# Altium PCB 正负开关电源.PcbDoc
Units mil, origin at the board's own origin, x right, y up, seen from the top; angles counter-clockwise.
Board outline 1968 x 1968 mil, 2 copper layers (Top Layer, Bottom Layer); 66 components, 32 nets, 180 pads, 772 vias.
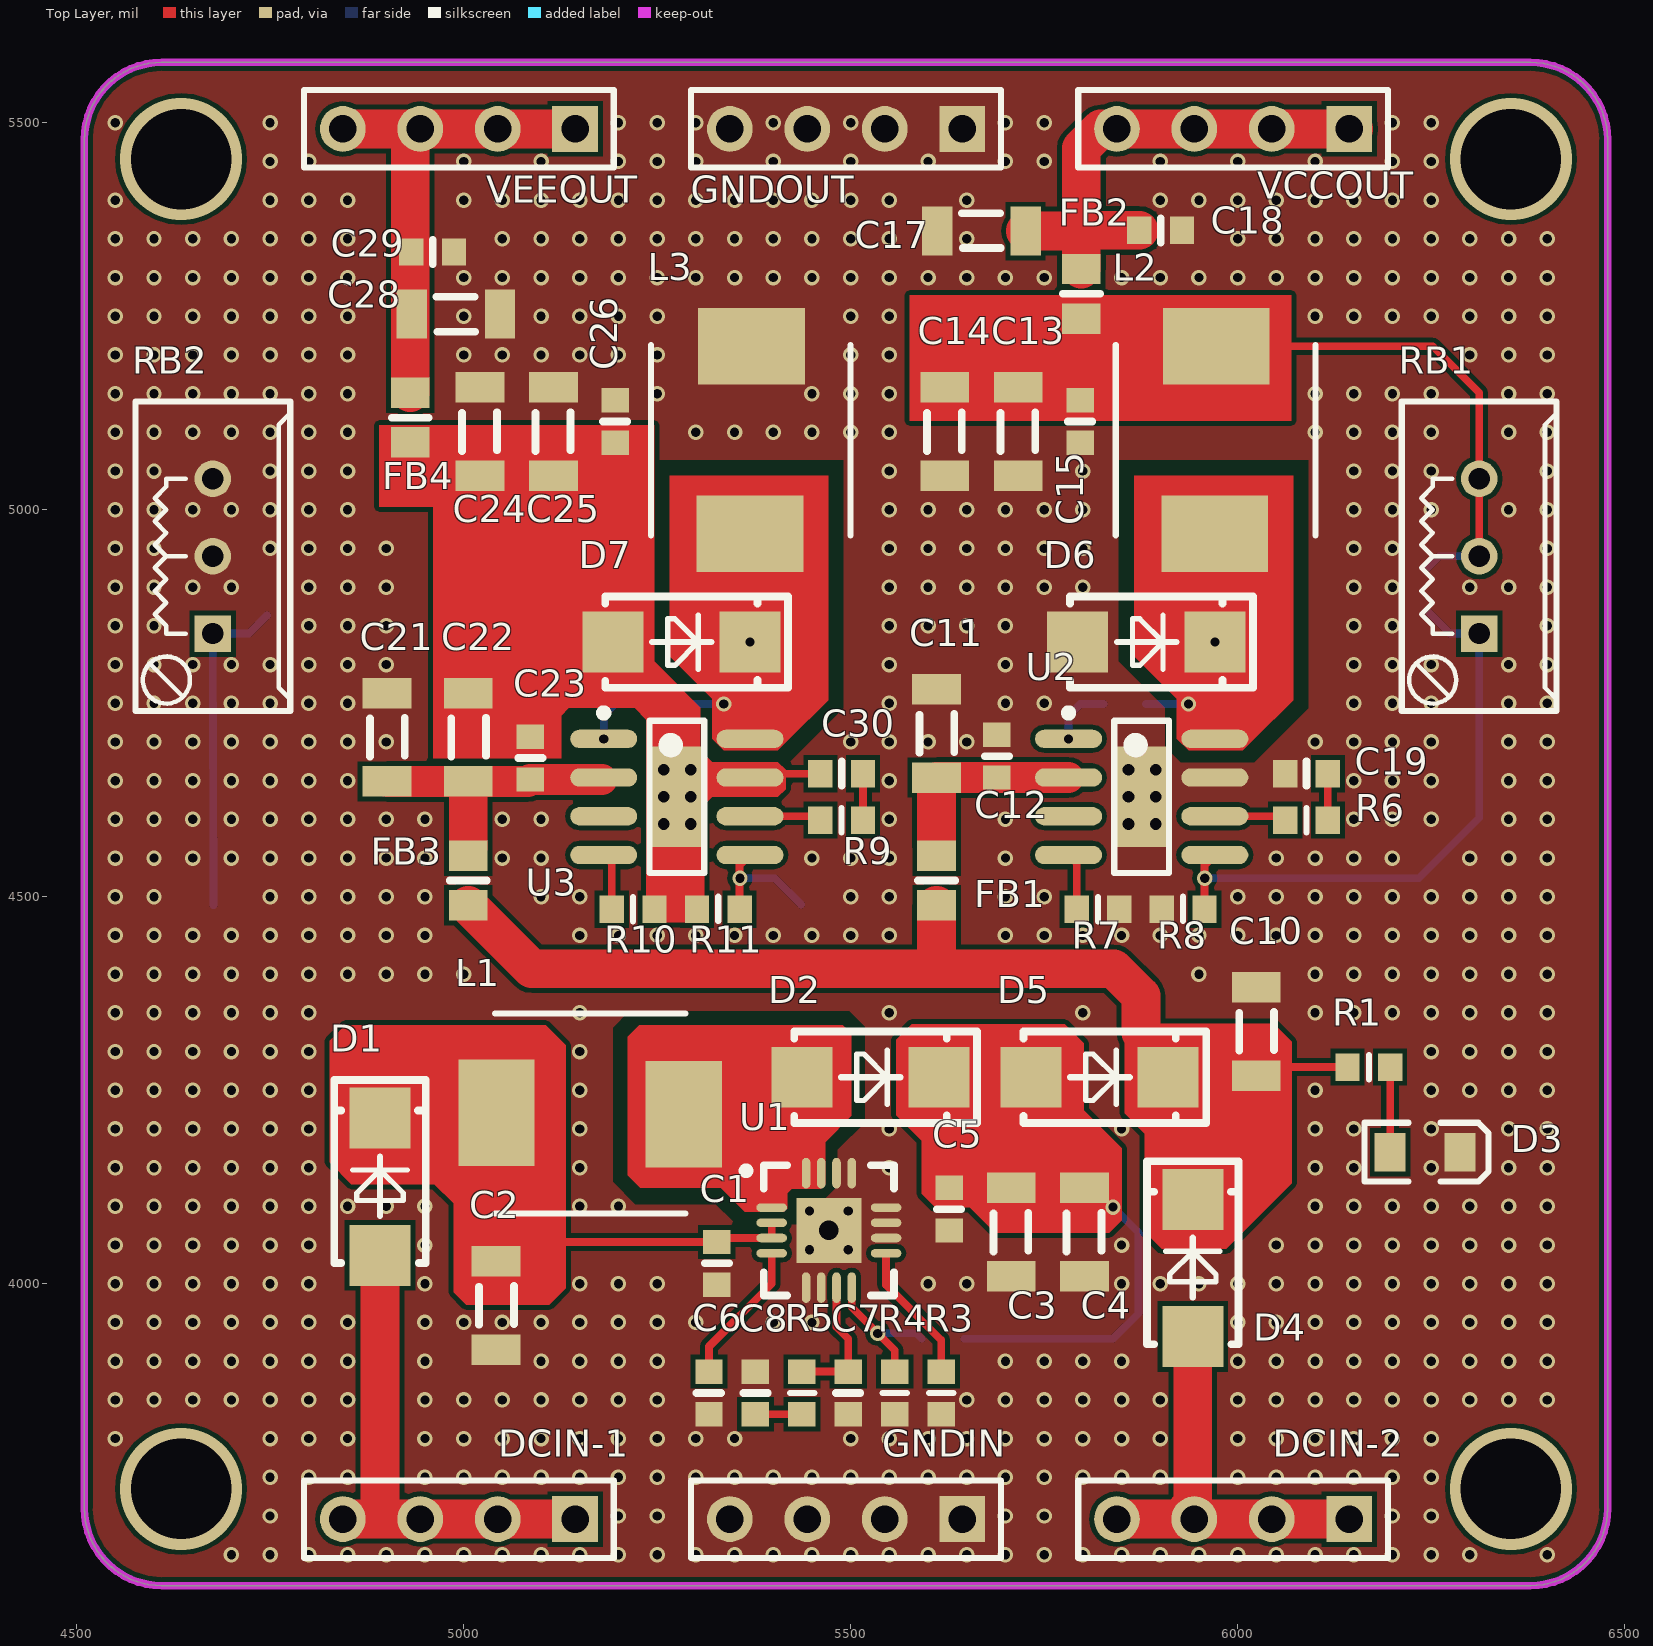
[diagram p0: Top Layer view]
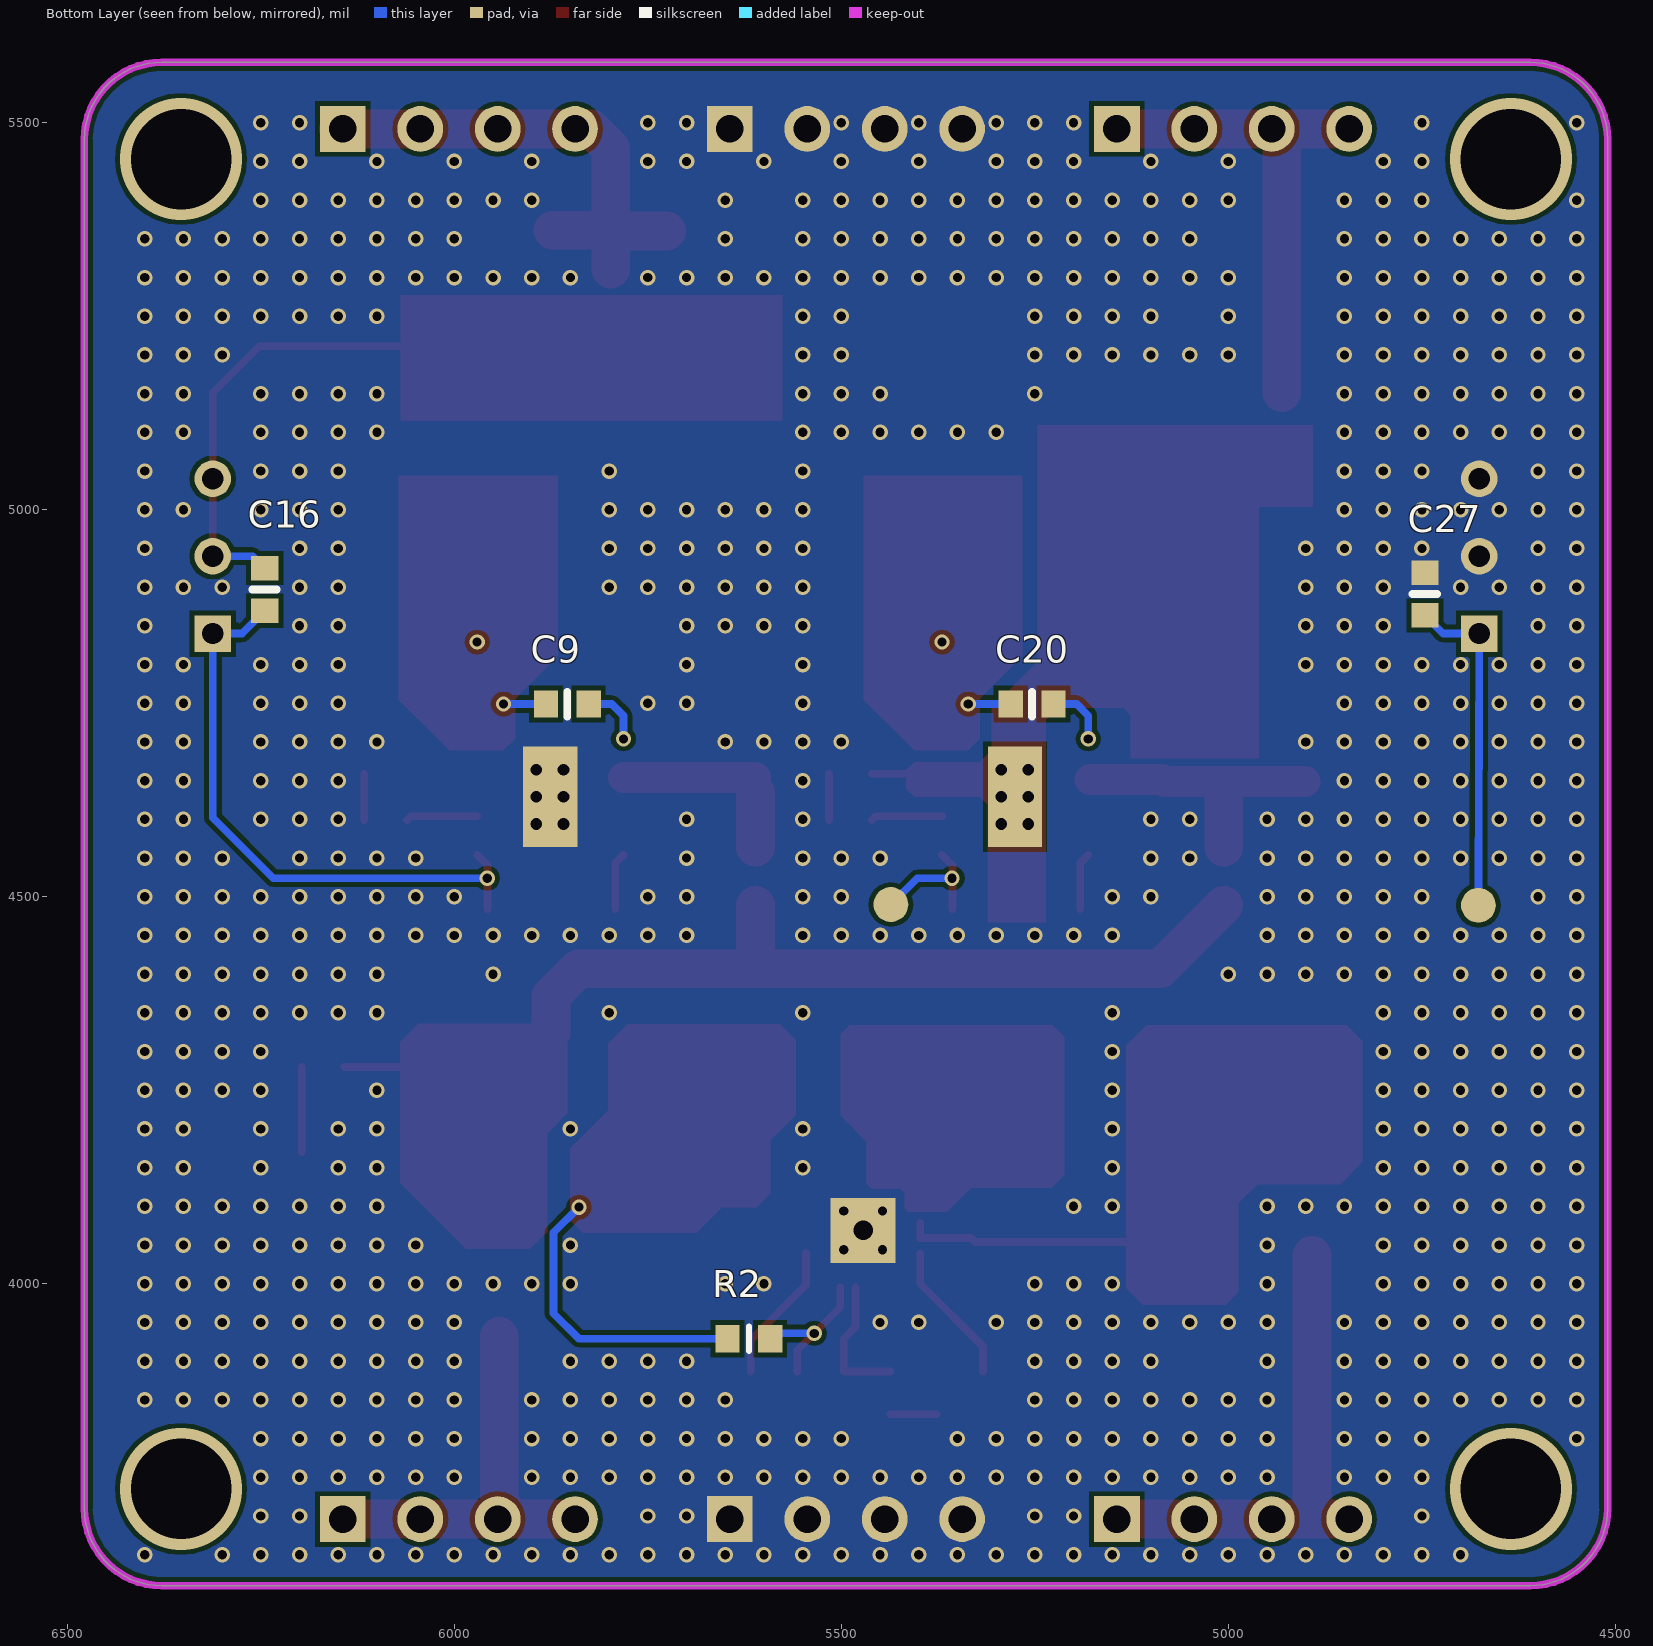
[diagram p1: Bottom Layer view, seen from below]

## Layer stack, top to bottom
Top Solder: solder mask 0.4, Solder Resist, Dk 3.5
Top Layer: signal copper 1.4
Dielectric 1: dielectric 12.6, FR-4, Dk 4.8
Bottom Layer: signal copper 1.4
Bottom Solder: solder mask 0.4, Solder Resist, Dk 3.5

## Board outline
4510,3710 ccw(c4610,3710) 4610,3610 6378,3610 ccw(c6378,3710) 6478,3710 6478,5478 ccw(c6378,5478) 6378,5578 4610,5578 ccw(c4610,5478) 4510,5478

## Design rules (kind name [scope] priority, off if disabled: settings)
Clearance [All] p1: gap=6 ignorepadtopadclearanceinfootprint=TRUE
ComponentClearance [All] p1: gap=0 collisioncheckmode=3 verticalgap=0 showdistances=FALSE
HoleSize [All] p1: absolutevalues=TRUE maxlimit=129.92 minlimit=3.94 maxpercent=80.000 minpercent=20.000
MinimumSolderMaskSliver [All] p1: minsoldermaskwidth=0
PolygonConnect [All] p1: connectstyle=Direct reliefconductorwidth=10 reliefentries=4 polygonreliefangle="90 Angle" airgapwidth=10
RoutingVias [All] p1: holewidth=11.81 width=19.68 viastyle="Through Hole" minholewidth=11.81 minwidth=19.68 maxholewidth=129.92 maxwidth=157.48
SilkToSilkClearance [All] p1: silktosilkclearance=0
SilkToSolderMaskClearance [IsPad] p1: minsilkscreentomaskgap=0 clearancetoexposedcopper=TRUE
SolderMaskExpansion [All] p1: expansion=4 istentingtop=FALSE
Width [All] p1: maxlimit=100 minlimit=5 preferedwidth=5 minimp=50.000000 maximp=50.000000 favimp=50.000000
25 further rules are at their usual default settings.

## Classes and differential pairs
component class power: C1 C2 C3 C4 C5 C6 C7 C8 C9 C10 C11 C12 C13 C14 C15 C16 C17 C18 C19 C20 C21 C22 C23 C24 C25 C26 C27 C28 C29 C30 D1 D2 D3 D4 D5 D6 D7 FB1 FB2 FB3 FB4 L1 L2 L3 R1 R2 R3 R4 R5 R6 R7 R8 R9 R10 R11 RB1 RB2 U1 U2 U3
component class ports: DCIN-1 DCIN-2 GNDIN GNDOUT VCCOUT VEEOUT

## Components (designator, comment, footprint, x,y, rotation, side; value= is the part's Value field where it differs from the comment)
C1 "Cap-S" C0603-L 5327,4026.44 r270 top value=100nF
C2 "Cap-S" C1206-L 5042,3971.91 r270 top value=47uF
C3 "Cap-S" C1206-L 5707.51,4066.91 r90 top value=47uF
C4 "Cap-S" C1206-L 5802,4066.91 r90 top value=47uF
C5 "Cap-S" C0603-L 5627.51,4096.44 r90 top value=100nF
C6 "Cap-S" C0603-L 5317,3859 r90 top value=47nF
C7 "Cap-S" C0603-L 5497,3859 r90 top value=270pF
C8 "Cap-S" C0603-L 5377,3859 r270 top value=100nF
C9 "Cap-S" C0603-L 5854.07,4749 r0 bottom value=100nF
C10 "Cap-S" C1206-L 6024,4326 r270 top value=47uF
C11 "Cap-S" C1206-L 5611,4711.09 r270 top value=22uF
C12 "Cap-S" C0603-L 5689,4681.56 r270 top value=100nF
C13 "Cap-S" C1206-L 5716.51,5101.09 r90 top value=47uF
C14 "Cap-S" C1206-L 5621.51,5101.09 r90 top value=47uF
C15 "Cap-S" C0603-L 5796.51,5114 r90 top value=100nF
C16 "Cap-S" C0603-L 6245,4897 r90 bottom value=20pF
C17 "Cap-S" C1206-L 5668.91,5360 r0 top value=47uF
C18 "Cap-S" C0603-L 5900.56,5361 r180 top value=100nF
C19 "Cap-S" C0603-L 6088.95,4659 r0 top value=6.8nF
C20 "Cap-S" C0603-L 5253.56,4749 r0 bottom value=100nF
C21 "Cap-S" C1206-L 4901,4706.09 r270 top value=22uF
C22 "Cap-S" C1206-L 5006,4706.09 r270 top value=22uF
C23 "Cap-S" C0603-L 5086,4679.12 r270 top value=100nF
C24 "Cap-S" C1206-L 5021,5101.09 r90 top value=47uF
C25 "Cap-S" C1206-L 5116,5101.09 r90 top value=47uF
C26 "Cap-S" C0603-L 5196,5114 r90 top value=100nF
C27 "Cap-S" C0603-L 4746,4891 r90 bottom value=20pF
C28 "Cap-S" C1206-L 4989.91,5253 r180 top value=47uF
C29 "Cap-S" C0603-L 4960.06,5333 r180 top value=100nF
C30 "Cap-S" C0603-L 5488.44,4659 r0 top value=6.8nF
D1 "D" D-SMA 4892,4125.42 r90 top
D2 "D" D-SMA 5525.58,4266.83 r0 top
D3 "LED" Led-0805_M 6242,4170 r0 top
D4 "D" D-SMA 5942,4020.42 r90 top
D5 "D" D-SMA 5821.58,4266.83 r0 top
D6 "D" D-SMA 5881.91,4829 r0 top
D7 "D" D-SMA 5281.39,4829 r0 top
DCIN-1 "Header 4" HDR1X4 5144,3696 r180 top
DCIN-2 "Header 4" HDR1X4 6144,3696 r180 top
FB1 "600R" FB-0805 5611,4521 r90 top
FB2 "600R" FB-0805 5798,5279 r90 top
FB3 "600R" FB-0805 5006,4521 r90 top
FB4 "600R" FB-0805 4931,5119 r90 top
GNDIN "Header 4" HDR1X4 5644,3696 r180 top
GNDOUT "Header 4" HDR1X4 5644,5492 r180 top
L1 "2.2uH" L-6.5mm 5163.44,4219.98 r0 top
L2 "10uH" L-6.5mm 5971.47,5090.06 r90 top
L3 "10uH" L-6.5mm 5370.96,5090.06 r90 top
R1 "R" R0603-L 6169.44,4280 r180 top value=30K
R2 "R" R0603-L 5619.56,3929 r0 bottom value=22K
R3 "R" R0603-L 5617,3859 r270 top value=75K
R4 "R" R0603-L 5557,3859 r90 top value=1.6K
R5 "R" R0603-L 5437,3859 r270 top value=1.8K
R6 "R" R0603-L 6088.95,4599 r180 top value=13K
R7 "R" R0603-L 5819.51,4484 r180 top value=110K
R8 "R" R0603-L 5929.51,4484 r0 top value=5.1K
R9 "R" R0603-L 5488.44,4599 r180 top value=13K
R10 "R" R0603-L 5219,4484 r180 top value=110K
R11 "R" R0603-L 5329,4484 r0 top value=5.1K
RB1 "R" R_VR-3296W 6312,4940 r90 top value=100K
RB2 "R" R_VR-3296W 4676,4940 r90 top value=100K
U1 "TPS55330" VQFN-16 5471.88,4069 r0 top
U2 "TPS54360" "SOP-8 with pad" 5876,4629 r0 top
U3 "TPS54360" "SOP-8 with pad" 5275.49,4629 r0 top
VCCOUT "Header 4" HDR1X4 6144,5492 r180 top
VEEOUT "Header 4" HDR1X4 5144,5492 r180 top

## Footprints (in the part's own frame and the unit in brackets; to place one, negate y for a bottom-side part, rotate by r counter-clockwise, add the part's x,y. Pads: shape width x height; smd on the part's side, far side on the other; paste and mask are expansions set on the pad)
C0603-L [mm] "贴片电容0603 高密度"
  rect 0.8x0.9 smd: 1(-0.7,0) 2(0.7,0)
  silkscreen extent 0,-0.39 0,0.41, body extent -0.8,-0.4 0.8,0.41, height 0.88
C1206-L [mm] "Capacitor 1206 (3216) for Startronics  高密度"
  rect 1x1.6 smd: 1(-1.45,0) 2(1.45,0)
  silkscreen extent -0.64,-0.56 0.63,0.58, body extent -1.63,-0.8 1.57,0.8, height 1
D-SMA [mm]
  rect 2x2 smd: 1(-2.25,0) 2(2.25,0)
  silkscreen extent -2.5,-1.5 3.5,1.5, body extent -2.5,-1.35 2.5,1.35, height 2.15
FB-0805 [mil]
  rect 39.37x50 smd: 1(-32,0) 2(32,0)
  silkscreen extent 0,-24 0,24, body extent -40,-25 40,25, height 28
HDR1X4 [mm] "Connector; Header; 4 Position"
  rect 1.5x1.5 hole 0.9: 1(0,0)
  round 1.5 hole 0.9: 2(2.54,0) 3(5.08,0) 4(7.62,0)
  silkscreen extent -1.27,-1.27 8.89,1.27, body extent -1.27,-1.27 8.89,1.27, height 7.58
L-6.5mm [mm]
  rect 2.5x3.5 smd: 1(-3.075,0.025) 2(3.075,-0.025)
  silkscreen extent -3.12,-3.28 3.12,3.28, body extent -3.13,-3 3.13,3, height 3
Led-0805_M [mil] "贴片LED0805-低密度"
  rect 40x50 smd: 1(-45,0) 2(45,0)
  silkscreen extent -78,-38 82,38, body extent -41,-16 40,20, height 33
R0603-L [mm] "贴片电阻0603 高密度"
  rect 0.8x0.9 smd: 1(-0.7,0) 2(0.7,0)
  silkscreen extent 0,-0.39 0,0.41, body extent -0.81,-0.43 0.79,0.39, height 0.53
R_VR-3296W [mm] "Potentiometer; 3 Leads"
  rect 1.2x1.2 hole 0.7: 1(-2.54,0)
  round 1.2 hole 0.7: 2(0,0) 3(2.54,0)
  silkscreen extent -5.08,-2.54 5.08,2.54, body extent -4.75,-2.54 4.75,2.46, height 11.5
"SOP-8 with pad" [mm]
  oval 2.2x0.6 smd: 1(-2.4,1.905) 2(-2.4,0.635) 3(-2.4,-0.635) 4(-2.4,-1.905) 5(2.4,-1.905) 6(2.4,-0.635) 7(2.4,0.635) 8(2.4,1.905)
  rect 1.778x3.3 smd: 9(0,0)
  rect 1.778x3.3 smd far side: 9(0,0)
  silkscreen extent -2.52,-2.5 0.9,2.88, body extent -3.03,-2.5 3.03,2.5, height 1.9
VQFN-16 [mm]
  oval 1x0.28 smd: 1(-1.877,0.75) 2(-1.877,0.25) 3(-1.877,-0.25) 4(-1.877,-0.75) 9(1.877,-0.75) 10(1.877,-0.25) 11(1.877,0.25) 12(1.877,0.75)
  oval 0.28x1 smd: 5(-0.75,-1.877) 6(-0.25,-1.877) 7(0.25,-1.877) 8(0.75,-1.877) 13(0.75,1.877) 14(0.25,1.877) 15(-0.25,1.877) 16(-0.75,1.877)
  rect 2.14x2.14 smd: 17(0,0)
  rect 2.14x2.14 smd far side: 17(0,0)
  silkscreen extent -2.83,-2.13 2.13,2.13, body extent -1.85,-1.85 1.85,1.85, height 1.4

## Part data
C1 C2 C3 C4 C5 C6 C7 C8 C9 C10 C11 C12 C13 C14 C15 C16 C17 C18 C19 C20 C21 C22 C23 C24 C25 C26 C27 C28 C29 C30: "贴片瓷片电容"
D1 D2 D4 D5 D6 D7: library part Diode, "二极管", Model=1N5824
D3: "发光二极管"
DCIN-1 DCIN-2 GNDIN GNDOUT VCCOUT VEEOUT: "Header, 4-Pin", LatestRevisionDate=17-Jul-2002, LatestRevisionNote="Re-released for DXP Platform.", Publisher="Altium Limited"
FB1 FB2 FB3 FB4: library part FB
L1 L2 L3: library part Inductor
R1 R2 R3 R4 R5 R6 R7 R8 R9 R10 R11: library part Res, "贴片电阻"
RB1 RB2: library part Res_Val, "可调电阻"
U2 U3: library part TPS54560

## Free pads (board coordinates)
  round 45 smd far side: 7(4677,4489) 7(5436,4490)

## Via types
v1: diameter 20, hole 12, Top Layer to Bottom Layer, tented both sides, 741 vias
v2: diameter 25, hole 15, Top Layer to Bottom Layer, 12 vias
v3: diameter 19.68, hole 11.81, Top Layer to Bottom Layer, tented both sides, 10 vias
v4: diameter 157.48, hole 129.92, Top Layer to Bottom Layer, 4 vias
v5: diameter 20, hole 12, Top Layer to Bottom Layer, 4 vias
v6: diameter 35, hole 25, Top Layer to Bottom Layer, 1 vias

## Nets (pads, with @x,y where several pads share a name; then routed paths per layer and width w, separated by ;. In a path a pad name is that pad's centre, name@x,y a point inside that pad or via, vN(x,y) a via of type N, cw(c..) or ccw(c..) an arc to the next point about the centre after c; other vN are vias at no path point)
+16.0V: C3.2 C4.2 C5.2 D2.2 D5.1 R2.2 | length 389.2
  Bottom Layer w10: R2.2 5839,3929 5872,3962 5872,4066 v3(5839,4099)
GND: C1.2 C2.2 C3.1 C4.1 C5.1 C6.1 C7.1 C8.1 C10.1 C11.1 C12.1 C13.1 C14.1 C15.1 C17.1 C18.1 C19.1 C21.1 C24.2 C25.2 C26.2 C27.2 C28.1 C29.1 D3.2 D6.1 GNDIN.1 GNDIN.2 GNDIN.3 GNDIN.4 GNDOUT.1 GNDOUT.2 GNDOUT.3 GNDOUT.4 L3.2 R3.2 R4.1 R7.1 R8.1 RB2.2 RB2.3 U1.5 U1.6 U1.10 U1.11 U1.12 U1.13 U1.14 U1.17 U2.7 U2.9
  other v1: 4700,3650 4750,3650 4800,3650 4850,3650 4900,3650 4950,3650 5000,3650 5050,3650 5100,3650 5150,3650 5200,3650 5250,3650 5300,3650 5350,3650 5400,3650 5450,3650 5500,3650 5550,3650 5600,3650 5650,3650 5700,3650 5750,3650 5800,3650 5850,3650 5900,3650 5950,3650 6000,3650 6050,3650 6100,3650 6150,3650 6200,3650 6250,3650 6300,3650 6400,3650 4750,3700 5200,3700 5250,3700 5700,3700 5750,3700 6200,3700 6250,3700 4750,3750 4800,3750 4850,3750 4950,3750 5000,3750 5050,3750 5100,3750 5150,3750 5200,3750 5250,3750 5300,3750 5350,3750 5400,3750 5450,3750 5500,3750 5550,3750 5600,3750 5650,3750 5700,3750 5750,3750 5800,3750 5850,3750 5900,3750 6000,3750 6050,3750 6100,3750 6150,3750 6200,3750 6250,3750 4550,3800 4750,3800 4800,3800 4850,3800 4950,3800 5000,3800 5050,3800 5100,3800 5150,3800 5200,3800 5250,3800 5300,3800 5350,3800 5500,3800 5550,3800 5600,3800 5650,3800 5700,3800 5750,3800 5800,3800 5850,3800 5900,3800 6000,3800 6050,3800 6100,3800 6150,3800 6200,3800 6250,3800 4550,3850 4600,3850 4650,3850 4700,3850 4750,3850 4800,3850 4850,3850 4950,3850 5000,3850 5050,3850 5100,3850 5150,3850 5200,3850 5250,3850 5650,3850 5700,3850 5750,3850 5800,3850 5850,3850 5900,3850 6000,3850 6050,3850 6100,3850 6150,3850 6200,3850 6250,3850 6300,3850 6350,3850 6400,3850 4550,3900 4600,3900 4650,3900 4700,3900 4750,3900 4800,3900 4850,3900 4950,3900 5100,3900 5150,3900 5200,3900 5250,3900 5700,3900 5750,3900 5800,3900 5850,3900 6000,3900 6050,3900 6100,3900 6150,3900 6200,3900 6250,3900 6300,3900 6350,3900 6400,3900 4550,3950 4600,3950 4650,3950 4700,3950 4750,3950 4800,3950 4850,3950 4950,3950 5000,3950 5050,3950 5100,3950 5150,3950 5200,3950 5250,3950 5300,3950 5400,3950 5450,3950 6000,3950 6050,3950 6100,3950 6150,3950 6200,3950 6250,3950 6300,3950 6350,3950 6400,3950 4550,4000 4600,4000 4650,4000 4700,4000 4750,4000 4800,4000 4950,4000 5150,4000 5200,4000 5250,4000 5600,4000 5650,4000 5850,4000 5900,4000 5950,4000 6000,4000 6050,4000 6100,4000 6150,4000 6200,4000 6250,4000 6300,4000 6350,4000 6400,4000 4550,4050 4600,4050 4650,4050 4700,4050 4750,4050 4800,4050 4950,4050 5850,4050 6050,4050 6100,4050 6150,4050 6200,4050 6250,4050 6300,4050 6350,4050 6400,4050 4550,4100 4600,4100 4650,4100 4700,4100 4750,4100 4800,4100 4850,4100 4900,4100 4950,4100 5150,4100 5200,4100 6100,4100 6150,4100 6200,4100 6250,4100 6300,4100 6350,4100 6400,4100 4550,4150 4600,4150 4650,4150 4700,4150 4750,4150 4800,4150 5150,4150 5550,4150 6100,4150 6150,4150 6250,4150 6350,4150 6400,4150 4550,4200 4600,4200 4650,4200 4700,4200 4750,4200 4800,4200 5150,4200 5550,4200 5850,4200 6100,4200 6150,4200 6250,4200 6350,4200 6400,4200 4550,4250 4600,4250 4650,4250 4700,4250 4750,4250 4800,4250 5150,4250 6100,4250 6250,4250 6300,4250 6350,4250 6400,4250 4550,4300 4600,4300 4650,4300 4700,4300 4750,4300 4800,4300 5150,4300 6250,4300 6300,4300 6350,4300 6400,4300 4550,4350 4600,4350 4650,4350 4700,4350 4750,4350 4800,4350 5150,4350 5550,4350 5800,4350 6100,4350 6150,4350 6200,4350 6250,4350 6300,4350 6350,4350 6400,4350 4550,4400 4600,4400 4650,4400 4700,4400 4750,4400 4800,4400 4850,4400 4900,4400 4950,4400 5000,4400 5950,4400 6100,4400 6150,4400 6200,4400 6250,4400 6300,4400 6350,4400 6400,4400 4550,4450 4600,4450 4650,4450 4700,4450 4750,4450 4800,4450 4850,4450 4900,4450 4950,4450 5150,4450 5200,4450 5250,4450 5300,4450 5350,4450 5400,4450 5450,4450 5500,4450 5550,4450 5700,4450 5750,4450 5800,4450 5850,4450 5900,4450 5950,4450 6000,4450 6050,4450 6100,4450 6150,4450 6200,4450 6250,4450 6300,4450 6350,4450 6400,4450 4550,4500 4600,4500 4750,4500 4800,4500 4850,4500 4900,4500 4950,4500 5100,4500 5150,4500 5500,4500 5550,4500 5700,4500 5750,4500 6000,4500 6050,4500 6100,4500 6150,4500 6200,4500 6250,4500 6300,4500 6350,4500 6400,4500 4550,4550 4600,4550 4650,4550 4700,4550 4750,4550 4800,4550 4850,4550 4900,4550 4950,4550 5050,4550 5100,4550 5450,4550 5500,4550 5550,4550 5700,4550 6050,4550 6100,4550 6150,4550 6200,4550 6300,4550 6350,4550 6400,4550 4550,4600 4600,4600 4650,4600 4700,4600 4750,4600 4800,4600 4850,4600 4900,4600 4950,4600 5050,4600 5100,4600 5550,4600 5700,4600 6150,4600 6200,4600 6250,4600 6350,4600 6400,4600 4550,4650 4600,4650 4650,4650 4700,4650 4750,4650 4800,4650 4850,4650 5550,4650 6150,4650 6200,4650 6250,4650 6350,4650 6400,4650 4550,4700 4600,4700 4650,4700 4700,4700 4750,4700 4800,4700 4850,4700 4900,4700 5500,4700 5550,4700 5600,4700 5650,4700 6100,4700 6150,4700 6200,4700 6250,4700 6350,4700 6400,4700 4550,4750 4600,4750 4650,4750 4700,4750 4750,4750 4800,4750 4850,4750 5550,4750 5700,4750 5750,4750 6150,4750 6200,4750 6250,4750 6350,4750 6400,4750 4550,4800 4600,4800 4650,4800 4700,4800 4750,4800 4800,4800 4850,4800 4900,4800 5550,4800 5700,4800 6150,4800 6200,4800 6250,4800 6350,4800 6400,4800 4550,4850 4600,4850 4800,4850 4850,4850 4900,4850 5550,4850 5600,4850 5650,4850 5700,4850 6150,4850 6200,4850 6400,4850 4550,4900 4600,4900 4650,4900 4700,4900 4800,4900 4850,4900 4900,4900 5550,4900 5600,4900 5650,4900 5700,4900 5750,4900 5800,4900 6150,4900 6200,4900 6300,4900 6350,4900 6400,4900 4550,4950 4600,4950 4750,4950 4800,4950 4850,4950 4900,4950 5550,4950 5600,4950 5650,4950 5700,4950 5750,4950 5800,4950 6150,4950 6200,4950 6400,4950 4550,5000 4600,5000 4650,5000 4700,5000 4750,5000 4800,5000 4850,5000 5550,5000 5600,5000 5650,5000 5700,5000 5750,5000 5800,5000 6150,5000 6200,5000 6250,5000 6350,5000 6400,5000 4550,5050 4600,5050 4750,5050 4800,5050 4850,5050 5550,5050 5800,5050 6150,5050 6200,5050 6250,5050 6400,5050 4550,5100 4600,5100 4650,5100 4700,5100 4750,5100 4800,5100 4850,5100 5300,5100 5350,5100 5400,5100 5450,5100 5500,5100 5550,5100 6100,5100 6150,5100 6200,5100 6250,5100 6350,5100 6400,5100 4550,5150 4600,5150 4650,5150 4700,5150 4750,5150 4800,5150 4850,5150 5250,5150 5450,5150 5500,5150 5550,5150 6100,5150 6150,5150 6200,5150 6250,5150 6350,5150 6400,5150 4550,5200 4600,5200 4650,5200 4700,5200 4750,5200 4800,5200 4850,5200 5000,5200 5050,5200 5100,5200 5150,5200 5200,5200 5250,5200 5500,5200 5550,5200 6300,5200 6350,5200 6400,5200 4550,5250 4600,5250 4650,5250 4700,5250 4750,5250 4800,5250 4850,5250 5000,5250 5100,5250 5150,5250 5200,5250 5250,5250 5500,5250 5550,5250 6100,5250 6150,5250 6200,5250 6250,5250 6300,5250 6350,5250 6400,5250 4550,5300 4600,5300 4650,5300 4700,5300 4750,5300 4800,5300 4850,5300 5000,5300 5050,5300 5100,5300 5150,5300 5200,5300 5250,5300 5300,5300 5350,5300 5400,5300 5450,5300 5500,5300 5550,5300 5600,5300 5650,5300 5700,5300 5750,5300 5850,5300 5900,5300 5950,5300 6000,5300 6050,5300 6100,5300 6150,5300 6200,5300 6250,5300 6300,5300 6350,5300 6400,5300 4550,5350 4600,5350 4650,5350 4700,5350 4750,5350 4800,5350 4850,5350 5050,5350 5100,5350 5150,5350 5200,5350 5250,5350 5300,5350 5350,5350 5400,5350 5450,5350 5500,5350 5550,5350 5650,5350 6000,5350 6050,5350 6100,5350 6150,5350 6200,5350 6250,5350 6300,5350 6350,5350 6400,5350 4550,5400 4750,5400 4800,5400 4850,5400 5000,5400 5050,5400 5100,5400 5150,5400 5200,5400 5250,5400 5300,5400 5350,5400 5400,5400 5450,5400 5500,5400 5550,5400 5650,5400 5900,5400 5950,5400 6000,5400 6050,5400 6100,5400 6150,5400 6200,5400 6250,5400 4750,5450 4800,5450 5000,5450 5100,5450 5200,5450 5250,5450 5300,5450 5400,5450 5500,5450 5600,5450 5700,5450 5750,5450 5900,5450 6000,5450 6100,5450 6200,5450 6250,5450 4550,5500 4750,5500 5200,5500 5250,5500 5300,5500 5400,5500 5500,5500 5700,5500 5750,5500 6200,5500 6250,5500
  other v2: 5859,4594 5894,4594 5859,4629 5894,4629 5859,4664 5894,4664
  other v5: 5446.88,4044 5496.88,4044 5446.88,4094 5496.88,4094
  other v6: 5471.88,4069
NetC1_1: C1.1 C2.1 D1.2 L1.1 U1.2 U1.3 | length 300.8
  Top Layer w10: 5119,4054 C1.1 5332.16,4059.16 U1.3 U1.2
NetC6_2: C6.2 U1.4 | length 186.5
  Top Layer w10: C6.2 5317,3919 5397.98,3999.98 U1.4
NetC7_2: C7.2 R5.1 U1.7 | length 174.9
  Top Layer w10: R5.1 C7.2 5497,3929 5481.72,3944.28 U1.7
NetC8_2: C8.2 R5.2 | length 60
  Top Layer w10: C8.2 R5.2
NetC9_1: C9.1 U2.1 | length 81.2
  Bottom Layer w10: v3(5781.51,4704) 5781.51,4734 5796.51,4749 C9.1
NetC9_2: C9.2 D6.2 L2.1 U2.8 | length 54.9
  Bottom Layer w10: C9.2 v3(5936.51,4749)
  other v3: 5970.49,4829
NetC10_2: C10.2 D4.2 D5.2 FB1.1 FB3.1 R1.2 | length 1164.7
  Top Layer w10: C10.2 6035.09,4280 R1.2
  Top Layer w50: FB3.1 5088,4407 5840,4407 5875,4372 5875,4324.25 ; 5611,4412 FB1.1
NetC11_2: C11.2 C12.2 FB1.2 U2.2 | length 240.5
  Top Layer w40: C11.2 C12.2 U2.2
  Top Layer w50: FB1.2@5611,4564 5611,4634
NetC16_1: C16.1 R8.2 RB1.1 U2.5 | length 779.5
  Top Layer w10: R8.2 5957.07,4540.58 U2.5
  Bottom Layer w10: v3(5957.51,4524) 6234,4524 6312,4602 RB1.1 6274.44,4840 C16.1
NetC19_2: C19.2 R6.1 | length 60
  Top Layer w10: R6.1 C19.2
NetC20_1: C20.1 U3.1 | length 81.2
  Bottom Layer w10: v3(5181,4704) 5181,4734 5196,4749 C20.1
NetC20_2: C20.2 D7.2 L3.1 U3.8 | length 54.9
  Bottom Layer w10: C20.2 v3(5336,4749)
  other v3: 5369.98,4829
NetC21_2: C21.2 C22.2 C23.2 FB3.2 U3.2 | length 348.6
  Top Layer w40: C21.2 C22.2 5083.44,4649 C23.2 U3.2@5178.56,4651.56
  Top Layer w50: FB3.2@5006,4564 C22.2@5006,4634
NetC27_1: C27.1 pad.7@4677,4489 RB2.1 | length 430.7
  Bottom Layer w10: pad.7@4677,4489 RB2.1 4722.56,4840 C27.1
NetC30_2: C30.2 R9.1 | length 60
  Top Layer w10: R9.1 C30.2
NetD2_1: D2.1 L1.2 U1.1 U1.15 U1.16
NetD3_1: D3.1 R1.1 | length 110
  Top Layer w10: D3.1 R1.1
NetR2_1: R2.1 R4.2 U1.8 | length 191.5
  Top Layer w10: U1.8 5501.41,3969.59 v3(5535,3936) 5557,3914 R4.2
  Bottom Layer w10: v3(5535,3936) 5585,3936 R2.1
NetR3_1: R3.1 U1.9 | length 182.4
  Top Layer w10: U1.9 5545.78,3998.5 5617,3927.28 R3.1
NetR6_2: R6.2 U2.6 | length 93
  Top Layer w10: U2.6 6056.39,4604 R6.2
NetR7_2: R7.2 U2.4 | length 74.3
  Top Layer w10: U2.4 5791.95,4543.56 R7.2
NetR9_2: R9.2 U3.6 | length 93
  Top Layer w10: U3.6 5455.88,4604 R9.2
NetR10_2: R10.2 U3.4 | length 74.3
  Top Layer w10: U3.4 5191.44,4543.56 R10.2
NetR11_2: pad.7@5436,4490 R11.2 U3.5 | length 168.6
  Top Layer w10: R11.2 5356.56,4540.58 U3.5
  Bottom Layer w10: v3(5357,4524) 5402,4524 pad.7@5436,4490
VCCBUF: C13.2 C14.2 C15.2 C16.2 FB2.1 L2.2 RB1.2 RB1.3 | length 648.8
  Top Layer w10: L2.2 6251.87,5211.13 6312,5151 RB1.3 RB1.2
  Bottom Layer w10: C16.2 6260.44,4940 RB1.2
VCCIN1: D1.1 DCIN-1.1 DCIN-1.2 DCIN-1.3 DCIN-1.4 | length 618.8
  Top Layer w50: DCIN-1.4 DCIN-1.3 DCIN-1.2 DCIN-1.1 ; 4892,3718 D1.1
VCCIN2: D4.1 DCIN-2.1 DCIN-2.2 DCIN-2.3 DCIN-2.4 | length 543.7
  Top Layer w50: DCIN-2.4 DCIN-2.3@5923,3696 ; D4.1 5942,3715 DCIN-2.3@5923,3696 ; DCIN-2.1 DCIN-2.2 DCIN-2.3 DCIN-2.3@5923,3696
VCCOUT: C17.2 C18.2 FB2.2 VCCOUT.1 VCCOUT.2 VCCOUT.3 VCCOUT.4 | length 646.4
  Top Layer w50: C17.2 5793,5360 5794,5361 ; FB2.2 5798,5361 ; VCCOUT.4@5823,5492 5798,5467 5798,5365 5794,5361 ; VCCOUT.4 VCCOUT.3 VCCOUT.2 VCCOUT.1 VCCOUT.1@6150,5492 ; C18.2 5798,5361 ; 5794,5361 5798,5361
VEEBUF: C22.1 C23.1 C24.1 C25.1 C26.1 C30.1 D7.1 FB4.1 R10.1 R11.1 U3.7 U3.9 | length 93
  Top Layer w10: U3.7 5374.98,4659 C30.1
  other v2: 5258.49,4594 5293.49,4594 5258.49,4629 5293.49,4629 5258.49,4664 5293.49,4664
VEEOUT: C28.2 C29.2 FB4.2 VEEOUT.1 VEEOUT.2 VEEOUT.3 VEEOUT.4 | length 641
  Top Layer w50: VEEOUT.4 VEEOUT.3@4931,5492 ; FB4.2 VEEOUT.3@4931,5492 ; VEEOUT.1 VEEOUT.2 VEEOUT.3 VEEOUT.3@4931,5492
pads on no net: U2.3 U3.3
copper on no net:
  other v4: 4635,3735 6353,3735 4635,5453 6353,5453

## Polygon pours and split planes (outlines as drawn)
GND on Bottom Layer "Bottom Layer-GND" (solid, pour order 4): 4510,5578 4510,3610 6478,3610 6478,5578 5910,5578
GND on Top Layer "Top Layer-GND" (solid, pour order 2): 4510,5578 4510,3610 6478,3610 6478,5578 5910,5578

## Keep-outs
Keep-Out Layer:
  the board outline again, w10

## Other copper
Top Layer:
  region net NetC10_2: 5854,4220 5880,4194 5880,4067 5902,4045 5985,4045 6070,4130 6070,4312.5 6046.5,4336 5872,4336 5854,4318
  pour cut-out: 5193,4132 5193,4331 5214,4352 5498,4352 5518,4332 5518,4208 5483,4173 5483,4126 5434,4077 5352,4077 5326,4103 5222,4103
  region net +16.0V: 5592,4116 5592,4185 5559,4218 5559,4315 5579,4335 5776.51,4335 5801,4310.51 5801,4224 5850,4175 5850,4082 5833.92,4065.92 5687.08,4065.92 5654,4099 5609,4099
  region net NetD2_1: 5228.41,4124 5332,4124 5363,4093 5414,4093 5418,4097 5418,4117 5424,4123 5461.09,4123 5467,4128.91 5467,4183 5501,4217 5501,4323 5490,4334 5227,4334 5212,4319 5212,4140.41
  region net NetC1_1: 4827,4157 4855.09,4128.91 4962.09,4128.91 4987,4104 4987,3989 5003.09,3972.91 5110.91,3972.91 5132,3994 5132,4307.91 5105.91,4334 4847,4334 4827,4314
  pour cut-out: 5846.51,4804 5906.51,4744 5906.51,4694 5926.51,4674 6021.51,4674 6090.95,4743.44 6090.95,5064 5846.51,5064
  pour cut-out: 5246,4804 5306,4744 5306,4694 5326,4674 5421,4674 5490.44,4743.44 5490.44,5064 5246,5064
  region net VCCBUF: 5576.51,5115 6069,5115 6069,5277 5576.51,5277
  region net NetC9_2: 5866.51,4810.84 5921.51,4755.84 5921.51,4704 5936.51,4689 6006.51,4689 6021.51,4704 6071.51,4754 6071.51,5044 5866.51,5044
  region net VEEBUF: 4961,4679.12 5126,4679.12 5126,4734 5136,4744 5221,4744 5236,4729 5236,4467 5311,4467 5311,4619 5321,4629 5406,4629 5416,4639 5416,4664 5406,4674 5321,4674 5306,4689 5306,4744 5246,4804 5246,5109 4891,5109 4891,5004 4961,5004 4961,4819
  region net NetC20_2: 5266,4810.84 5321,4755.84 5321,4704 5336,4689 5406,4689 5421,4704 5471,4754 5471,5044 5266,5044

## Silkscreen, mask and mechanical layers (free items; w line width, h text height)
Mechanical 1:
  lines w6: 4770,3696 4865,3696 ; 6123,3696 6218,3696
  lines w10: 4510,3710 ccw(c4610,3710) 4610,3610 6378,3610 ccw(c6378,3710) 6478,3710 6478,5478 ccw(c6378,5478) 6378,5578 4610,5578 ccw(c4610,5478) 4510,5478 4510,3710